# Altium PCB Thumb.PcbDoc (part 2 of 2)
Units mm, origin at the board's own origin, x right, y up, seen from the top; angles counter-clockwise.
Board outline 100.7 x 63.21 mm, 4 copper layers (Top Layer, Plane 1, Plane 2, Bottom Layer), stack 0.781 mm thick; 93 components, 47 nets, 311 pads, 257 vias.
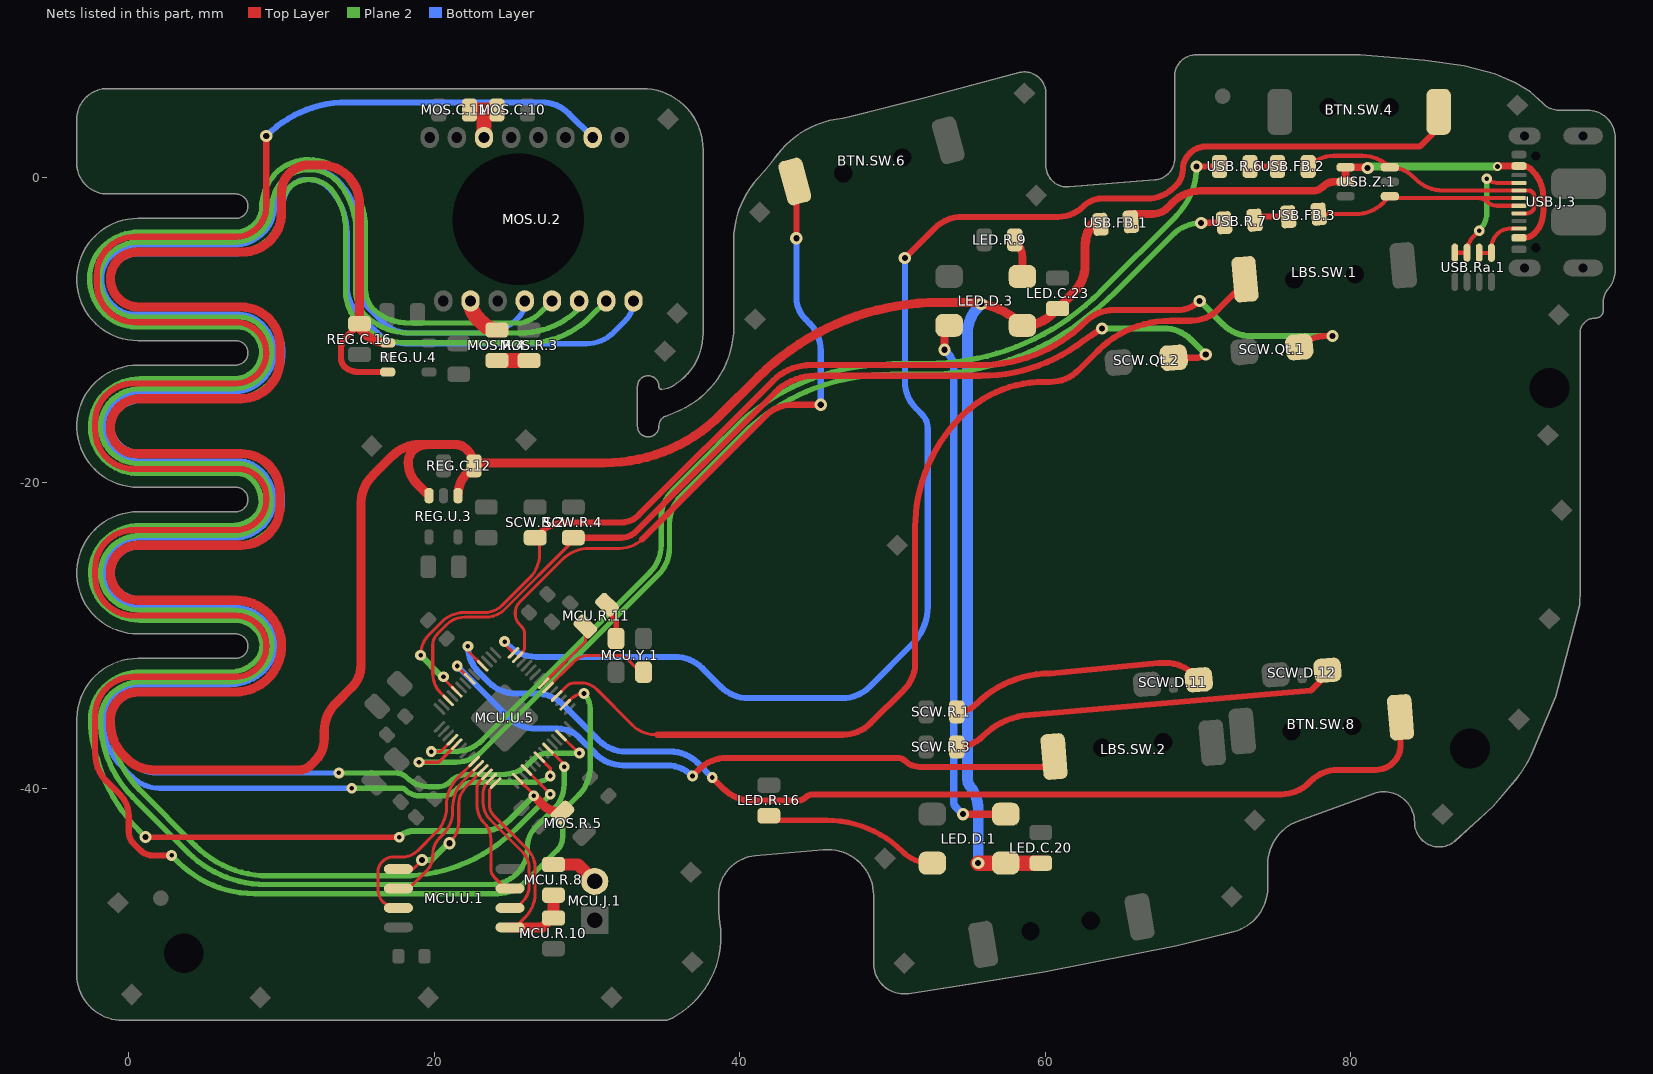
[diagram p4: the nets of this part, all layers, seen from the top]

## Via types
v1: diameter 0.8, hole 0.4, Top Layer to Bottom Layer, tented both sides, 188 vias
v2: diameter 1.016, hole 0.508, Top Layer to Bottom Layer, tented both sides, 28 vias
v3: diameter 0.7, hole 0.3, Top Layer to Bottom Layer, tented both sides, 28 vias
v4: diameter 0.45, hole 0.45, Top Layer to Bottom Layer, tented both sides, 8 vias
v5: diameter 0.6, hole 0.6, Top Layer to Bottom Layer, tented both sides, 4 vias
v6: diameter 0.6, hole 0.3, Top Layer to Bottom Layer, tented both sides, 1 vias

## Nets (pads, with @x,y where several pads share a name; then routed paths per layer and width w, separated by ;. In a path a pad name is that pad's centre, name@x,y a point inside that pad or via, vN(x,y) a via of type N, cw(c..) or ccw(c..) an arc to the next point about the centre after c; other vN are vias at no path point) (continued)
NetBTN.SW.4_A: BTN.SW.4.A MCU.U.5.28 | length 95.9
  Top Layer w0.2: v3(24.6,-30.4) 24.6,-30.556 MCU.U.5.28@25.183,-31.14
  Top Layer w0.4: v1(50.8,-5.3) 52.756,-3.344 cw(c54.552,-5.14) 54.552,-2.6 60.81,-2.6 ccw(c60.81,-0.21) 62.5,-1.9 cw(c63.707,-3.107) 63.707,-1.4 66.648,-1.4 ccw(c66.648,1.14) 68.444,-0.656 68.576,-0.524 ccw(c67.551,0.5) 69,0.5 cw(c70.449,0.5) 69.424,1.524 69.5,1.6 cw(c70.466,0.634) 70.466,2 84.5,2 85.75,3.25 BTN.SW.4.A@85.75,4.275
  Bottom Layer w0.4: v3(24.6,-30.4) 24.856,-30.656 ccw(c26.652,-28.86) 26.652,-31.4 35.748,-31.4 cw(c35.748,-33.94) 37.544,-32.144 38.756,-33.356 ccw(c40.552,-31.56) 40.552,-34.1 46.707,-34.1 ccw(c46.707,-31.56) 48.503,-33.356 51.267,-30.592 ; v1(50.8,-5.3) 50.8,-13.348 ccw(c53.34,-13.348) 51.544,-15.144 51.914,-15.514 cw(c50.983,-16.445) 52.3,-16.445 52.3,-16.447 52.3,-28.099 cw(c48.776,-28.099) 51.267,-30.592
NetBTN.SW.6_A: BTN.SW.6.A MCU.U.5.27 | length 43.5
  Top Layer w0.2: MCU.U.5.27@25.466,-31.423 25.767,-31.122 ccw(c25.444,-30.8) 25.9,-30.8 25.9,-29.883 ccw(c25.217,-29.883) 25.7,-29.4 25.583,-29.283 cw(c26.266,-28.6) 25.3,-28.6 25.3,-28.5 cw(c26.266,-28.5) 25.583,-27.817 28.356,-25.044 cw(c30.152,-26.84) 30.152,-24.3 32.151,-24.3 ccw(c32.151,-22.251) 33.6,-23.7
  Top Layer w0.4: 33.6,-23.7 41.656,-15.644 cw(c43.452,-17.44) 43.452,-14.9 v1(45.3,-14.9) ; v1(43.7,-4) BTN.SW.6.A@43.7,-0.597
  Bottom Layer w0.4: v1(43.7,-4) 43.7,-7.851 ccw(c45.749,-7.851) 44.3,-9.3 44.556,-9.556 cw(c42.76,-11.352) 45.3,-11.352 v1(45.3,-14.9)
NetBTN.SW.8_B: BTN.SW.8.B MCU.U.5.32 | length 70.2
  Top Layer w0.2: v3(22.2,-30.7) 22.2,-31.02 MCU.U.5.32@23.168,-31.988
  Top Layer w0.4: v3(38.2,-39.3) 38.956,-40.056 ccw(c40.752,-38.26) 40.752,-40.8 43.817,-40.8 ccw(c43.817,-40.117) 44.3,-40.6 cw(c44.783,-41.083) 44.783,-40.4 75.448,-40.4 ccw(c75.448,-37.86) 77.244,-39.656 77.356,-39.544 cw(c79.152,-41.34) 79.152,-38.8 81.625,-38.8 ccw(c81.625,-37.171) 82.777,-38.323 ccw(c81.625,-37.171) 83.254,-37.171 BTN.SW.8.B@83.254,-35.348
  Bottom Layer w0.4: v3(22.2,-30.7) ccw(c24.614,-30.7) 22.907,-32.407 23.556,-33.056 ccw(c25.352,-31.26) 25.352,-33.8 26.648,-33.8 cw(c26.648,-36.34) 28.444,-34.544 30.756,-36.856 ccw(c32.552,-35.06) 32.552,-37.6 35.448,-37.6 cw(c35.448,-40.14) 37.244,-38.344 v3(38.2,-39.3)
NetLBS.SW.1_A: LBS.SW.1.A MCU.U.5.18 | length 65.6
  Top Layer w0.2: MCU.U.5.18@28.012,-33.968 28.654,-33.326 cw(c29.2,-33.873) 29.2,-33.1 29.6,-33.1 cw(c29.6,-34.549) 30.624,-33.524 32.979,-35.879 ccw(c34.477,-34.381) 34.6,-36.496
  Top Layer w0.4: 34.6,-36.5 46.748,-36.5 ccw(c46.748,-33.96) 48.544,-35.756 50.756,-33.544 ccw(c48.96,-31.748) 51.474,-32.111 ccw(c51.078,-32.057) 51.478,-32.058 51.478,-22.981 51.478,-22.979 cw(c61.802,-22.955) 51.478,-22.876 ; 51.478,-22.875 cw(c61.754,-22.951) 51.576,-21.53 cw(c61.802,-22.955) 54.501,-15.655 54.502,-15.654 cw(c59.901,-20.993) 59.905,-13.4 60.348,-13.4 ccw(c60.348,-10.86) 62.144,-12.656 63.421,-11.379 cw(c68.197,-16.153) 68.197,-9.4 69.53,-9.4 ccw(c69.53,-6.86) 71.326,-8.656 LBS.SW.1.A@72.995,-6.987
NetLBS.SW.2_B: LBS.SW.2.B MCU.U.5.35 | length 43.6
  Top Layer w0.2: v3(21.5,-32) 21.5,-32.017 MCU.U.5.35@22.32,-32.837
  Top Layer w0.4: v3(36.9,-39.2) 37.336,-38.764 cw(c39.132,-40.56) 39.132,-38.02 50.365,-38.02 cw(c50.365,-38.635) 50.8,-38.2 ccw(c51.766,-37.234) 51.766,-38.6 59.898,-38.6 LBS.SW.2.B@60.571,-37.927
  Bottom Layer w0.4: v3(21.5,-32) 24.856,-35.356 ccw(c26.652,-33.56) 26.652,-36.1 28.1,-36.1 cw(c28.1,-38.031) 29.466,-36.666 30.556,-37.756 ccw(c32.352,-35.96) 32.352,-38.5 35.21,-38.5 cw(c35.21,-40.89) v3(36.9,-39.2)
NetLED.D.1_2: LED.D.1.2 LED.D.3.4 | length 35.3
  Top Layer w0.5: v1(53.4,-11.3) 53.4,-10 LED.D.3.4@53.7,-9.7 ; v1(54.6,-41.7) LED.D.1.2@57.4,-41.7
  Bottom Layer w0.5: v1(53.4,-11.3) 53.576,-11.476 cw(c52.551,-12.5) 54,-12.5 54,-40.893 ccw(c54.5,-40.893) 54.146,-41.246 v1(54.6,-41.7)
NetLED.D.1_4: LED.D.1.4 LED.R.16.1 | length 11.5
  Top Layer w0.35: LED.R.16.1@41.9,-41.802 ccw(c42.618,-41.084) 42.618,-42.1 45.69,-42.1 cw(c45.692,-49.12) 50.657,-44.157 50.658,-44.158 ccw(c52.452,-42.36) 52.452,-44.9 LED.D.1.4@52.6,-44.9
NetLED.D.3_2: LED.D.3.2 LED.R.9.2 | length 2.5
  Top Layer w0.5: LED.R.9.2@58.002,-4.1 cw(c56.801,-5.301) 58.5,-5.301 ; LED.D.3.2@58.5,-6.5 58.5,-5.301
NetMCU.J.1_2: MCU.J.1.2 MCU.R.8.1 | length 3.2
  Top Layer w0.8: MCU.R.8.1@27.8,-44.998 29.398,-44.998 MCU.J.1.2@30.5,-46.1
NetMCU.R.8_2: MCU.R.8.2 MCU.R.10.2 MCU.U.1.1 MCU.U.5.56 | length 15.5
  Top Layer w0.2: MCU.U.5.56@24.017,-39.66 23.758,-39.919 ccw(c24.138,-40.3) 23.6,-40.3 23.6,-41.083 ccw(c24.607,-41.083) 23.895,-41.795 26.105,-44.005 cw(c24.91,-45.2) 26.6,-45.2 26.6,-46.877 cw(c24.372,-46.877) 25.948,-48.452 ; MCU.U.1.1@25.295,-49.105 25.947,-48.452
  Top Layer w0.65: MCU.U.1.1@24.95,-49.105 25.295,-49.105 27.093,-49.105 MCU.R.10.2@27.8,-48.398
  Top Layer w0.8: MCU.R.10.2@27.8,-48.398 MCU.R.8.2@27.8,-47.202
NetMCU.R.11_1: MCU.R.11.1 MCU.U.5.21 | length 4.8
  Top Layer w0.2: MCU.U.5.21@27.163,-33.12 29.891,-30.392 MCU.R.11.1@29.891,-29.409
NetMCU.R.11_2: MCU.R.11.2 MCU.Y.1.3 | length 2.5
  Top Layer w0.35: MCU.R.11.2@31.309,-27.991 31.309,-28.409 31.9,-29 MCU.Y.1.3@31.9,-30.2
NetMCU.U.1_2: MCU.U.1.2 MCU.U.5.55 | length 10.5
  Top Layer w0.2: MCU.U.5.55@23.734,-39.377 23.447,-39.665 ccw(c24.042,-40.26) 23.2,-40.26 23.2,-40.964 ccw(c24.736,-40.964) 23.65,-42.05 25.776,-44.176 cw(c24.751,-45.2) 26.2,-45.2 26.2,-46.41 cw(c24.775,-46.41) 25.783,-47.417 ; MCU.U.1.2@24.95,-47.835 25.365,-47.835 25.782,-47.417
NetMCU.U.1_3: MCU.U.1.3 MCU.U.5.54 | length 8.6
  Top Layer w0.2: 23.25,-42.25 cw(c24.336,-41.164) 22.8,-41.164 22.8,-40 cw(c23.414,-40) 22.98,-39.566 MCU.U.5.54@23.451,-39.095 ; 23.25,-42.25 cw(c22.164,-43.336) 23.7,-43.336 23.7,-45.282 ccw(c24.468,-45.282) 23.925,-45.825 ; 23.925,-45.825 24.665,-46.565 MCU.U.1.3@24.95,-46.565
NetMCU.U.1_5: MCU.U.1.5 MCU.U.5.53 | length 9.6
  Top Layer w0.2: MCU.U.1.5@17.65,-45.295 18.605,-45.295 v1(19.2,-44.7) ; v1(21,-43.6) ccw(c19.551,-42.151) 21.6,-42.151 21.6,-41.073 cw(c23.273,-41.073) 22.09,-39.89 MCU.U.5.53@23.168,-38.812
  Plane 2 w0.4: v1(19.2,-44.7) 19.8,-44.7 20.9,-43.6 v1(21,-43.6)
NetMCU.U.1_6: MCU.U.1.6 MCU.U.5.52 | length 10.3
  Top Layer w0.2: MCU.U.1.6@17.65,-46.565 18.335,-46.565 19.5,-45.4 ccw(c18.534,-44.434) 19.9,-44.434 19.9,-44.35 cw(c21.469,-44.35) 20.36,-43.24 20.55,-43.05 ; 20.551,-43.049 ccw(c18.981,-41.481) 21.2,-41.481 21.2,-41.266 cw(c23.74,-41.266) 21.944,-39.47 MCU.U.5.52@22.885,-38.529
NetMCU.U.1_7: MCU.U.1.7 MCU.U.5.51 | length 13.6
  Top Layer w0.2: 16.667,-47.467 cw(c17.555,-46.58) 16.3,-46.58 16.3,-45.524 cw(c17.324,-45.524) 16.6,-44.8 cw(c17.324,-45.524) 17.324,-44.5 17.912,-44.5 ccw(c17.912,-43.081) 18.916,-44.084 20.15,-42.85 ccw(c18.581,-41.281) 20.8,-41.281 20.8,-41.101 cw(c23.34,-41.101) 21.544,-39.305 MCU.U.5.51@22.602,-38.246 ; 16.668,-47.468 ccw(c17.555,-46.58) 17.555,-47.835 MCU.U.1.7@17.65,-47.835
NetMCU.U.5_2: MCU.U.5.2 MOS.R.5.1 MOS.U.2.12 | length 165.4
  Top Layer w0.2: MCU.U.5.2@25.466,-39.377 26.5,-40.411 v3(26.5,-40.5)
  Top Layer w0.35: v1(1.1,-43.2) v3(17.7,-43.2)
  Top Layer w0.6: v3(26.5,-40.5) 27.026,-41.026 ccw(c28.391,-39.66) MOS.R.5.1@28.391,-41.591
  Plane 2 w0.35: v1(1.1,-43.2) 0.656,-42.756 cw(c8.107,-35.302) -2.066,-38.059 ccw(c-2.403,-38.152) -2.072,-38.039 cw(c5.342,-35.496) -2.496,-35.496 cw(c0.496,-35.496) -1.93,-33.746 cw(c0.228,-35.302) -1.927,-33.742 cw(c0.278,-35.329) -1.863,-33.657 cw(c0.507,-35.507) -1.622,-33.383 cw(c0.749,-35.749) -0.557,-32.665 cw(c0.749,-35.749) 0.749,-32.4 6.2,-32.4 6.61,-32.4 ccw(c6.61,-30.044) 7.93,-31.996 ccw(c6.61,-30.044) 8.13,-31.844 ccw(c7.903,-31.578) 8.149,-31.826 8.365,-31.611 ccw(c8.116,-31.365) 8.387,-31.586 ccw(c7.203,-30.635) 8.714,-30.791 ccw(c7.203,-30.635) 8.457,-29.778 ccw(c8.168,-29.976) 8.446,-29.763 ccw(c7.103,-30.8) 8.303,-29.6 8.156,-29.453 ccw(c6.893,-30.987) 6.886,-29 6.794,-29 1.4,-29 0.705,-29 cw(c0.7,-25.716) -1.622,-28.039 cw(c0.506,-25.91) -1.734,-27.92 cw(c0.506,-25.91) -2.043,-24.31 cw(c0.506,-25.91) -1.62,-23.78 cw(c0.749,-26.153) 0.749,-22.8 5.2,-22.8 6.77,-22.8 ccw(c6.77,-20.674) 7.835,-22.514 ccw(c6.77,-20.674) 8.27,-22.181 ccw(c7.34,-21.24) 8.642,-21.472 ccw(c7.34,-21.24) 8.663,-21.241 ccw(c6.591,-21.241) 8.46,-20.347 ccw(c6.591,-21.241) 8.055,-19.775 ccw(c7.148,-20.684) 7.152,-19.4 cw(c7.147,-18.75) 7.15,-19.4 cw(c7.147,-18.75) 7.142,-19.4 0.611,-19.4 cw(c0.607,-16.251) -0.031,-19.335 cw(c0.607,-16.251) -1.616,-18.481 cw(c0.529,-16.329) -2.326,-15.291 cw(c0.529,-16.329) -1.615,-14.176 cw(c0.749,-16.549) 0.749,-13.2 4,-13.2 6.867,-13.2 ccw(c6.867,-11.329) 7.399,-13.123 ccw(c6.867,-11.329) 8.185,-12.656 ccw(c6.981,-11.444) 8.606,-11.972 ccw(c6.981,-11.444) 8.376,-10.458 ccw(c6.981,-11.444) 8.159,-10.207 cw(c9.052,-9.262) 8.131,-10.18 ccw(c7.21,-11.107) 7.928,-10.015 ccw(c7.21,-11.107) 7.215,-9.8 cw(c7.209,-9.15) 7.204,-9.8 0.471,-9.8 cw(c0.466,-6.876) -1.588,-8.958 cw(c0.72,-6.621) -2.564,-6.621 cw(c0.32,-6.621) -1.723,-4.585 cw(c0.649,-6.949) 0.649,-3.6 6.93,-3.6 6.932,-3.6 ccw(c6.932,-1.73) 8.254,-3.053 ccw(c7.176,-1.976) 8.687,-2.173 ccw(c8.342,-2.118) 8.689,-2.162 ccw(c7.151,-1.976) 8.7,-1.977 8.7,-1.901 cw(c10.35,-1.904) 8.711,-1.713 cw(c9.357,-1.783) 8.712,-1.704 cw(c12.365,-2.164) 8.912,-0.888 cw(c11.159,-1.716) 8.913,-0.883 cw(c12.365,-2.164) 8.964,-0.754 cw(c12.064,-2.039) 9.306,-0.127 cw(c12.064,-2.039) 9.675,0.318 ; 9.675,0.318 cw(c10.847,-0.844) 9.788,0.422 cw(c11.782,-1.97) 11.782,1.144 cw(c11.781,-2.165) 13.003,0.91 cw(c11.781,-2.165) 14.134,0.161 cw(c13.211,-0.754) 14.199,0.09 cw(c10.039,-3.447) 15.401,-2.411 ccw(c15.744,-2.343) 15.404,-2.426 cw(c12.31,-3.202) 15.5,-3.202 15.5,-3.347 cw(c12.96,-3.352) 15.5,-3.352 15.5,-7.353 ccw(c17.452,-7.344) 15.903,-8.532 ccw(c16.179,-8.317) 15.934,-8.567 ccw(c18.31,-6.187) 16.855,-9.219 ; 16.856,-9.219 16.857,-9.22 ccw(c18.361,-5.958) 18.354,-9.55 25.616,-9.55 ccw(c25.614,-9.2) 25.685,-9.543 ccw(c25.149,-7.06) 26.945,-8.856 MOS.U.2.12@27.701,-8.1
  Plane 2 w0.4: v3(17.7,-43.2) cw(c18.666,-44.166) 18.666,-42.8 23.148,-42.8 ccw(c23.148,-40.26) 24.944,-42.056 v3(26.5,-40.5)
NetMCU.U.5_4: MCU.U.5.4 MOS.U.2.10 | length 166.5
  Top Layer w0.2: MCU.U.5.4@26.032,-38.812 27.6,-40.38 v3(27.6,-40.4)
  Plane 2 w0.35: 4.344,-43.744 0.721,-40.121 0.719,-40.119 cw(c5.342,-35.496) -1.196,-35.495 cw(c0.496,-35.496) -0.7,-34.3 cw(c0.749,-35.749) 0.749,-33.7 6.608,-33.7 ccw(c6.61,-30.044) 9.196,-32.628 ccw(c7.203,-30.635) 9.219,-28.664 9.218,-28.663 ccw(c6.893,-30.987) 6.892,-27.7 6.891,-27.7 0.7,-27.7 cw(c0.7,-25.716) -0.702,-27.12 cw(c0.506,-25.91) -0.702,-24.7 cw(c0.749,-26.153) 0.749,-24.1 6.767,-24.1 ccw(c6.77,-20.674) 9.194,-23.095 ccw(c7.34,-21.24) 9.963,-21.239 ccw(c6.591,-21.241) 8.974,-18.855 ccw(c7.148,-20.684) 7.148,-18.1 0.607,-18.1 cw(c0.607,-16.251) -0.699,-17.56 -0.7,-17.559 cw(c0.529,-16.329) -0.699,-15.099 cw(c0.749,-16.549) 0.749,-14.5 6.865,-14.5 ccw(c6.867,-11.329) 9.108,-13.572 ccw(c6.981,-11.444) 9.052,-9.262 ccw(c7.21,-11.107) 7.21,-8.5 0.468,-8.5 cw(c0.466,-6.876) -0.682,-8.025 cw(c0.72,-6.621) -1.264,-6.619 cw(c0.32,-6.621) -0.799,-5.499 cw(c0.649,-6.949) 0.649,-4.9 7.004,-4.9 ccw(c7.005,-1.82) 9.179,-4.002 ccw(c7.249,-2.062) 9.94,-2.558 ccw(c7.249,-2.062) 9.941,-2.555 ccw(c7.151,-1.976) 10,-1.976 10,-1.903 cw(c10.35,-1.904) 10.003,-1.861 cw(c12.365,-2.164) 10.165,-1.25 cw(c12.064,-2.039) 10.599,-0.597 cw(c10.847,-0.844) 10.624,-0.574 cw(c11.782,-1.97) 11.785,-0.156 cw(c11.781,-2.165) 13.211,-0.754 cw(c10.039,-3.447) 14.2,-3.432 14.2,-3.433 14.2,-7.517 ccw(c16.97,-7.524) 15.018,-9.489 ccw(c18.31,-6.187) 18.315,-10.85 26.113,-10.85 ccw(c26.111,-5.067) 30.201,-9.156 MOS.U.2.10@31.257,-8.1 ; 4.345,-43.745 ccw(c9.16,-38.932) 9.16,-45.74 17.899,-45.74 ccw(c17.899,-35.212) 25.344,-42.657 v3(27.6,-40.4)
NetMCU.U.5_7: MCU.U.5.7 MOS.U.2.13 | length 158.1
  Top Layer w0.2: MCU.U.5.7@26.88,-37.963 27.6,-38.683 v3(27.6,-39.2)
  Plane 2 w0.35: v3(14.6,-40) 16.393,-40 17.859,-40 cw(c17.859,-40.341) 18.1,-40.1 ccw(c19.066,-39.134) 19.066,-40.5 20.576,-40.5 ccw(c20.576,-39.476) 21.3,-40.2 cw(c22.749,-41.649) 22.749,-39.6 24.834,-39.6 26.634,-39.6 ccw(c26.634,-38.234) v3(27.6,-39.2)
  Bottom Layer w0.35: 13.731,-0.268 ccw(c11.735,-2.266) 11.734,0.558 ccw(c11.736,-1.605) 10.207,-0.075 ccw(c11.805,-1.673) 9.545,-1.673 9.545,-1.9 cw(c7.11,-1.9) 9.019,-3.411 cw(c7.11,-1.9) 8.828,-3.625 cw(c6.851,-1.651) 6.851,-4.445 0.649,-4.445 ccw(c0.649,-7.024) -1.179,-5.204 ccw(c0.262,-6.637) -1.77,-6.631 ccw(c0.683,-6.638) -1.044,-8.381 ccw(c1.157,-6.156) -1.042,-8.383 -1.041,-8.384 -1.039,-8.386 ccw(c-0.792,-8.138) -1.037,-8.388 ccw(c0.412,-6.91) 0.415,-8.98 0.47,-8.98 4.9,-8.98 7.209,-8.98 cw(c7.209,-11.091) 8.325,-9.299 cw(c7.209,-11.091) 8.703,-9.6 8.753,-9.649 cw(c6.904,-11.5) 9.52,-11.5 cw(c7.085,-11.5) 9.509,-11.729 cw(c7.085,-11.5) 8.805,-13.224 8.753,-13.275 cw(c6.897,-11.422) 7.463,-13.983 cw(c6.897,-11.422) 6.897,-14.045 0.811,-14.045 ccw(c0.811,-16.669) -0.662,-14.498 ccw(c0.811,-16.669) -1.041,-14.811 ccw(c0.463,-16.32) -1.462,-15.407 ccw(c0.463,-16.32) -1.668,-16.324 ccw(c0.547,-16.32) -1.555,-17.019 ccw(c0.547,-16.32) -1.015,-17.89 ccw(c0.656,-16.21) -0.452,-18.305 ccw(c0.656,-16.21) 0.659,-18.58 1.7,-18.58 6.7,-18.58 7.124,-18.58 cw(c7.124,-20.776) 8.678,-19.225 8.727,-19.274 cw(c6.879,-21.125) 9.366,-20.313 cw(c6.879,-21.125) 9.495,-21.125 9.495,-21.153 cw(c7.128,-21.153) 9.436,-21.676 cw(c7.128,-21.153) 8.8,-22.828 cw(c6.887,-20.912) 7.726,-23.487 cw(c6.887,-20.912) 6.887,-23.62 3.8,-23.62 0.647,-23.62 ccw(c0.642,-25.921) -0.51,-23.929 ccw(c0.642,-25.921) -1.261,-24.627 ccw(c0.642,-25.921) -1.658,-25.991 cw(c-3.102,-26.032) -1.657,-26.033 ccw(c0.289,-26.033) -1.628,-26.37 ccw(c0.289,-26.033) -1.086,-27.411 ccw(c0.774,-25.548) -0.89,-27.588 ccw(c0.774,-25.548) 0.776,-28.18 1.9,-28.18 7.008,-28.18 cw(c7.008,-30.717) 8.803,-28.925 8.813,-28.934 cw(c7.05,-30.7) 9.545,-30.7 cw(c7.351,-30.7) 8.901,-32.253 8.878,-32.275 cw(c6.6,-30) 7.275,-33.148 cw(c6.6,-30) 6.6,-33.22 2.8,-33.22 0.653,-33.22 ccw(c0.65,-35.55) -0.087,-33.339 ccw(c0.65,-35.55) -1.116,-34.03 ccw(c0.65,-35.55) -1.68,-35.51 -1.68,-35.677 ccw(c2.524,-35.625) -1.269,-37.438 ccw(c2.524,-35.625) -0.65,-38.382 0.224,-39.256 ccw(c2.02,-37.46) 2.02,-40 v3(14.6,-40) ; 13.732,-0.268 cw(c10.664,-3.333) 15,-3.334 15,-3.335 15,-6.823 ccw(c17.54,-6.823) 15.744,-8.619 16.581,-9.456 ccw(c18.377,-7.66) 18.377,-10.2 23.169,-10.2 23.171,-10.2 ccw(c23.171,-6.992) 25.44,-9.26 25.519,-9.181 ccw(c24.49,-8.153) 25.942,-8.248 ccw(c25.542,-8.223) 25.942,-8.235 25.939,-8.204 ccw(c25.541,-8.241) 25.931,-8.153 25.923,-8.153 MOS.U.2.13@25.923,-8.1
NetMCU.U.5_9: MCU.U.5.9 MOS.U.2.11 | length 170.3
  Top Layer w0.2: MCU.U.5.9@27.446,-37.398 28.5,-38.451 v3(28.5,-38.6)
  Plane 2 w0.35: -1.399,-34.121 ccw(c0.496,-35.496) -1.846,-35.496 ccw(c5.342,-35.496) 0.263,-40.582 0.469,-40.789 0.471,-40.791 0.473,-40.792 3.877,-44.196 ccw(c8.956,-39.118) 8.956,-46.3 23.71,-46.3 ccw(c23.71,-43.91) 25.4,-45.6 ccw(c23.71,-43.91) 26.1,-43.91 26.1,-43.8 cw(c27.79,-43.8) 26.595,-42.605 27.8,-41.4 ccw(c26.11,-39.71) 28.5,-39.71 v3(28.5,-38.6) ; -1.353,-34.059 cw(c0.507,-35.507) -1.161,-33.842 cw(c0.749,-35.749) 0.749,-33.05 6.2,-33.05 6.608,-33.05 ccw(c6.61,-30.044) 8.574,-32.319 ccw(c8.345,-32.055) 8.591,-32.304 8.856,-32.039 ccw(c7.203,-30.635) 9.163,-29.707 ccw(c7.203,-30.635) 8.758,-29.123 ccw(c8.507,-29.367) 8.755,-29.12 ccw(c6.893,-30.987) 6.888,-28.35 6.7,-28.35 0.704,-28.35 ; 0.703,-28.35 0.7,-28.35 cw(c0.7,-25.716) -1.162,-27.579 cw(c0.506,-25.91) -1.854,-25.899 cw(c0.506,-25.91) -1.161,-24.24 cw(c0.749,-26.153) 0.749,-23.45 5.2,-23.45 6.767,-23.45 ccw(c6.77,-20.674) 7.406,-23.376 ccw(c6.77,-20.674) 8.39,-22.929 ccw(c6.77,-20.674) 8.731,-22.639 ccw(c7.34,-21.24) 9.156,-22.011 ccw(c7.34,-21.24) 9.313,-21.241 ccw(c6.591,-21.241) 9.047,-20.068 ccw(c6.591,-21.241) 8.513,-19.314 ccw(c7.148,-20.684) 7.147,-18.75 ccw(c7.144,-19.1) 7.144,-18.75 0.611,-18.75 cw(c0.607,-16.251) -0.54,-18.471 cw(c0.607,-16.251) -1.157,-18.021 cw(c0.529,-16.329) -1.157,-14.638 cw(c0.749,-16.549) 0.749,-13.85 4,-13.85 6.865,-13.85 ccw(c6.867,-11.329) 8.275,-13.42 ccw(c6.867,-11.329) 8.647,-13.114 ccw(c6.981,-11.444) 9.122,-12.433 ccw(c6.981,-11.444) 8.766,-9.902 ccw(c6.981,-11.444) 8.604,-9.733 cw(c9.052,-9.262) 8.591,-9.721 ccw(c7.21,-11.107) 7.209,-9.15 ccw(c7.206,-9.5) 7.206,-9.15 0.47,-9.15 cw(c0.466,-6.876) -1.138,-8.489 cw(c0.72,-6.621) -1.491,-8.053 cw(c0.72,-6.621) -1.914,-6.621 cw(c0.32,-6.621) -1.261,-5.042 cw(c0.649,-6.949) 0.649,-4.25 6.965,-4.25 6.967,-4.25 ccw(c6.967,-1.789) 8.704,-3.533 ccw(c7.151,-1.976) 9.35,-1.976 9.35,-1.903 cw(c10.35,-1.904) 9.35,-1.902 cw(c10.35,-1.904) 9.357,-1.784 ; 9.357,-1.783 cw(c12.365,-2.164) 9.565,-1.002 cw(c12.064,-2.039) 10.137,-0.14 cw(c10.847,-0.844) 10.207,-0.075 cw(c11.782,-1.97) 10.631,0.209 cw(c11.782,-1.97) 11.784,0.494 cw(c11.781,-2.165) 13.097,0.145 cw(c11.781,-2.165) 13.672,-0.296 cw(c13.211,-0.754) 13.706,-0.333 cw(c10.039,-3.447) 14.766,-2.551 ccw(c15.109,-2.484) 14.77,-2.569 cw(c12.31,-3.202) 14.85,-3.202 14.85,-4.6 14.85,-7.337 ccw(c17.452,-7.344) 15.415,-8.963 15.415,-8.964 ccw(c15.689,-8.745) 15.433,-8.984 ccw(c16.97,-7.524) 15.477,-9.029 ccw(c18.31,-6.187) 18.304,-10.2 25.62,-10.2 25.621,-10.2 ccw(c25.619,-4.742) 29.371,-8.707 ccw(c29.129,-8.453) 29.479,-8.455 MOS.U.2.11@29.479,-8.1
NetMCU.U.5_12: MCU.U.5.12 MOS.U.2.9 | length 165.8
  Top Layer w0.2: MCU.U.5.12@28.295,-36.549 29.446,-37.7 v3(29.5,-37.7)
  Plane 2 w0.35: v3(13.758,-39) 17.476,-39 cw(c17.476,-40.024) 18.2,-39.3 ccw(c19.649,-37.851) 19.649,-39.9 20.276,-39.9 ccw(c20.276,-38.876) 21,-39.6 cw(c22.207,-40.807) 22.207,-39.1 24.448,-39.1 ccw(c24.448,-36.56) 26.244,-38.356 26.5,-38.1 cw(c27.466,-39.066) 27.466,-37.7 v3(29.5,-37.7)
  Bottom Layer w0.35: 0.101,-27.497 ccw(c0.774,-25.548) 0.774,-27.61 7.058,-27.61 cw(c7.058,-30.15) 7.528,-27.654 cw(c7.008,-30.717) 8.973,-28.311 cw(c7.008,-30.717) 9.208,-28.523 9.215,-28.53 cw(c7.05,-30.7) 10.108,-30.493 cw(c7.05,-30.7) 10.115,-30.7 cw(c7.351,-30.7) 9.303,-32.657 9.283,-32.677 cw(c6.6,-30) 8.726,-33.138 cw(c6.6,-30) 6.6,-33.79 5.2,-33.79 ccw(c5.199,-34.14) 5.199,-33.79 2.8,-33.79 2.799,-33.79 0.655,-33.79 ccw(c0.65,-35.55) 0.148,-33.863 ccw(c0.65,-35.55) -0.642,-34.354 ccw(c0.65,-35.55) -1.109,-35.497 -1.109,-35.698 ccw(c-0.759,-35.697) -1.109,-35.703 ccw(c2.524,-35.625) -0.641,-37.41 ccw(c2.524,-35.625) -0.36,-37.836 0.06,-38.256 ccw(c1.856,-36.46) 1.856,-39 13.1,-39 v3(13.758,-39) ; 0.101,-27.497 cw(c0.774,-25.548) -0.606,-27.08 cw(c-0.371,-26.821) -0.617,-27.07 -0.74,-26.947 cw(c0.289,-26.033) -1.087,-26.034 ccw(c-3.102,-26.032) -1.088,-25.973 cw(c0.642,-25.921) -1.089,-25.939 -1.089,-25.901 cw(c0.642,-25.921) -0.868,-25.074 cw(c0.642,-25.921) 0.414,-24.205 cw(c0.642,-25.921) 0.644,-24.19 ccw(c0.647,-23.62) 0.65,-24.19 3.8,-24.19 6.887,-24.19 ccw(c6.887,-20.912) 7.91,-24.026 8.072,-23.973 ccw(c7.279,-21.56) 9.075,-23.356 9.111,-23.32 ccw(c6.887,-20.912) 9.202,-23.233 ccw(c7.128,-21.153) 10.065,-21.153 10.065,-21.125 ccw(c6.879,-21.125) 10.034,-20.681 ccw(c6.879,-21.125) 9.319,-19.076 ccw(c7.36,-20.693) 9.179,-18.92 ccw(c6.879,-21.125) 9.129,-18.869 9.083,-18.823 ccw(c7.124,-20.776) 9.043,-18.784 ccw(c7.124,-20.776) 7.132,-18.01 ccw(c7.075,-20.549) 7.075,-18.009 0.609,-18.009 cw(c0.656,-16.21) -0.62,-17.479 cw(c0.547,-16.32) -1.096,-16.395 cw(c0.547,-16.32) -1.098,-16.327 cw(c0.463,-16.32) -1.027,-15.854 cw(c0.463,-16.32) -0.667,-15.243 cw(c-0.414,-15.485) -0.663,-15.239 -0.613,-15.189 cw(c0.811,-16.669) 0.254,-14.692 cw(c0.811,-16.669) 0.811,-14.615 6.897,-14.615 ccw(c6.897,-11.422) 7.107,-14.608 ccw(c6.897,-11.422) 8.879,-13.926 ccw(c6.897,-11.422) 9.157,-13.678 9.207,-13.627 ccw(c7.085,-11.5) 9.921,-12.494 9.932,-12.462 ccw(c9.602,-12.347) 9.937,-12.448 9.937,-12.446 ccw(c7.085,-11.5) 10.09,-11.5 ccw(c6.904,-11.5) 9.753,-10.074 ccw(c6.904,-11.5) 9.155,-9.245 9.108,-9.198 ccw(c7.209,-11.091) 7.21,-8.41 ; 7.209,-8.41 4.9,-8.41 cw(c4.899,-8.06) 4.899,-8.41 0.472,-8.41 ccw(c0.47,-8.98) 0.47,-8.41 0.412,-8.41 cw(c0.412,-6.91) -0.638,-7.981 cw(c0.683,-6.638) -0.854,-7.726 cw(c0.683,-6.638) -1.187,-6.862 cw(c0.683,-6.638) -1.2,-6.636 cw(c0.262,-6.637) -0.957,-5.829 cw(c0.262,-6.637) -0.774,-5.605 cw(c0.649,-7.024) -0.313,-5.26 cw(c0.649,-7.024) 0.649,-5.015 6.851,-5.015 ccw(c6.851,-1.651) 8.25,-4.71 ccw(c6.851,-1.651) 9.232,-4.027 ccw(c7.11,-1.9) 9.882,-3.06 ccw(c7.11,-1.9) 10.115,-1.9 10.115,-1.802 cw(c11.852,-1.802) 10.624,-0.574 cw(c11.632,-1.583) 11.632,-0.156 11.785,-0.156 cw(c11.785,-1.98) 13.073,-0.689 cw(c10.117,-3.649) 14.3,-3.649 14.3,-3.65 14.3,-7.148 ccw(c16.84,-7.148) 15.044,-8.944 16.256,-10.156 ccw(c18.052,-8.36) 18.052,-10.9 29.948,-10.9 ccw(c29.948,-8.36) 31.744,-10.156 32.494,-9.406 ccw(c31.188,-8.1) MOS.U.2.9@33.035,-8.1
NetMCU.U.5_16: MCU.U.5.16 MOS.U.2.7 | length 176.8
  Top Layer w0.2: MCU.U.5.16@28.577,-34.534 28.966,-34.146 ; 28.966,-34.145 cw(c29.8,-34.98) v3(29.8,-33.8)
  Top Layer w0.4: v3(2.8,-44.4) 1.552,-44.4 cw(c1.552,-43.309) 0.78,-44.08 0.3,-43.6 cw(c1.024,-42.876) 0,-42.876 0,-41.8 ccw(c-1.931,-41.8) -0.566,-40.434 -1.456,-39.544 cw(c0.34,-37.748) -2.2,-37.748 -2.2,-36.595 -2.2,-36.594 -2.2,-35.24 cw(c0.34,-35.24) 0.34,-32.7 7,-32.7 ccw(c7,-30.7) 9,-30.7 ccw(c7,-30.7) 7,-28.7 0.34,-28.7 cw(c0.34,-26.16) -2.2,-26.16 -2.2,-25.64 cw(c0.34,-25.64) 0.34,-23.1 7,-23.1 ccw(c7,-21.1) 9,-21.1 9,-20.956 ccw(c7.144,-20.956) 7.144,-19.1 0.34,-19.1 cw(c0.34,-16.56) -2.2,-16.56 -2.2,-16.04 cw(c0.34,-16.04) 0.34,-13.5 7,-13.5 ccw(c7,-11.5) 9,-11.5 ccw(c7,-11.5) 7,-9.5 0.44,-9.5 cw(c0.44,-6.96) -2.1,-6.96 -2.1,-6.44 cw(c0.44,-6.44) 0.44,-3.9 7,-3.9 ccw(c7,-1.9) 9,-1.9 v1(9,2.7)
  Plane 2 w0.35: v3(2.8,-44.4) 3.227,-44.827 ccw(c8.231,-39.823) 8.231,-46.9 24.148,-46.9 ccw(c24.148,-44.36) 25.944,-46.156 28.046,-44.054 ccw(c27.193,-43.2) 28.4,-43.2 28.4,-42.207 cw(c30.107,-42.207) 28.9,-41 29.456,-40.444 ccw(c27.66,-38.648) 30.2,-38.648 30.2,-34.766 ccw(c28.834,-34.766) v3(29.8,-33.8)
  Bottom Layer w0.4: v1(9,2.7) cw(c14.309,-2.605) 14.309,4.9 14.311,4.9 27.016,4.9 cw(c27.016,2.36) 28.812,4.156 MOS.U.2.7@30.368,2.6
NetMCU.U.5_20: MCU.U.5.20 MCU.Y.1.1 | length 7.5
  Top Layer w0.2: MCU.U.5.20@27.446,-33.402 29.088,-31.761 cw(c30.2,-32.873) 30.2,-31.3 32.017,-31.3 cw(c32.017,-32.224) 32.671,-31.571 33.5,-32.4 MCU.Y.1.1@33.7,-32.4
NetMCU.U.5_38: MCU.U.5.38 SCW.Qt.1.E SCW.R.2.2 | length 76.7
  Top Layer w0.2: v3(19.1,-31.3) cw(c21.031,-31.3) 19.666,-29.934 19.924,-29.676 ; 19.924,-29.676 20.5,-29.1 cw(c21.949,-30.549) 21.949,-28.5 23.3,-28.5 ccw(c23.3,-26.869) 24.453,-28.022 26.384,-26.092 ccw(c24.486,-24.6) 26.9,-24.6 26.9,-24.327 ccw(c25.876,-24.327) SCW.R.2.2@26.6,-23.602 ; v3(20.6,-32.7) 20.6,-32.814 MCU.U.5.38@21.471,-33.685
  Top Layer w0.4: SCW.R.2.2@26.6,-23.602 26.858,-23.344 cw(c28.655,-25.14) 28.655,-22.6 32.248,-22.6 ccw(c32.248,-21.026) 33.36,-22.14 ; 33.361,-22.139 42.173,-13.327 cw(c44.652,-15.806) 44.652,-12.3 55.759,-12.3 ccw(c55.761,-2.549) 62.657,-9.443 cw(c64.452,-11.24) 64.452,-8.7 68.651,-8.7 ccw(c68.651,-6.651) v1(70.1,-8.1) ; SCW.Qt.1.E@76.621,-11.118 cw(c78.354,-12.851) 78.354,-10.4 v1(78.8,-10.4)
  Plane 2 w0.4: v3(19.1,-31.3) 20.429,-32.629 ccw(c20.6,-32.459) v3(20.6,-32.7) ; v1(70.1,-8.1) 71.656,-9.656 ccw(c73.452,-7.86) 73.452,-10.4 v1(78.8,-10.4)
NetMCU.U.5_40: MCU.U.5.40 SCW.Qt.2.E SCW.R.4.2 | length 65.3
  Top Layer w0.2: MCU.U.5.40@20.905,-34.251 20.427,-33.773 cw(c21.7,-32.5) 19.9,-32.5 19.9,-30.6 cw(c20.866,-30.6) 20.183,-29.917 20.8,-29.3 cw(c22.007,-30.507) 22.007,-28.8 23.393,-28.8 ccw(c23.393,-27.093) 24.6,-28.3 28.96,-23.94 ccw(c28.623,-23.602) SCW.R.4.2@29.1,-23.602
  Top Layer w0.4: SCW.R.4.2@29.1,-23.602 32.245,-23.602 ccw(c32.245,-22.27) 33.187,-23.213 ; 33.188,-23.212 42.302,-14.098 cw(c44.952,-16.747) 44.952,-13 55.774,-13 55.775,-13 ccw(c55.778,-2.045) 62.483,-10.708 cw(c62.729,-11.023) 62.509,-10.689 63.312,-10.157 v1(63.7,-9.9) ; SCW.Qt.2.E@68.396,-11.818 69.974,-11.818 ccw(c69.974,-11.074) v1(70.5,-11.6)
  Plane 2 w0.4: v1(63.7,-9.9) 67.748,-9.9 cw(c67.748,-12.44) 69.544,-10.644 v1(70.5,-11.6)
NetMCU.U.5_46: MCU.U.5.46 USB.R.6.2 | length 70.7
  Top Layer w0.2: v3(19.8,-37.6) 20.42,-37.6 MCU.U.5.46@21.188,-36.832
  Top Layer w0.4: v1(69.9,0.7) USB.R.6.2@71.398,0.7
  Plane 2 w0.35: v3(19.8,-37.6) 21.341,-37.6 ccw(c21.341,-35.06) 23.137,-36.856 34.106,-25.887 ccw(c32.31,-24.091) 34.85,-24.091 34.85,-22.302 cw(c37.39,-22.302) 35.594,-20.506 38.276,-17.824 ccw(c38.027,-17.578) 38.283,-17.816 cw(c51.191,-29.717) 39.29,-16.81 ccw(c39.051,-16.554) 39.298,-16.802 40.141,-15.959 cw(c40.848,-16.666) 40.188,-15.915 cw(c49.908,-26.973) 49.295,-12.263 ccw(c49.279,-11.913) 49.315,-12.261 cw(c51.191,-29.717) 50.008,-12.201 cw(c50.03,-12.55) 50.03,-12.2 52.256,-12.2 ccw(c52.27,3.805) 63.589,-7.511 68.571,-2.529 ccw(c65.313,0.7) v1(69.9,0.7)
NetMCU.U.5_47: MCU.U.5.47 USB.R.7.2 | length 70.7
  Top Layer w0.2: v3(19,-38.3) 20.286,-38.3 MCU.U.5.47@21.471,-37.115
  Top Layer w0.3: v1(70.2,-3) cw(c70.23,-3.03) v1@70.23,-2.987
  Top Layer w0.4: v1@70.23,-2.987 USB.R.7.2@71.701,-2.987
  Plane 2 w0.35: v3(19,-38.3) 21.4,-38.3 ccw(c21.4,-35.886) 23.107,-37.593 34.656,-26.044 ccw(c32.86,-24.248) 35.4,-24.248 35.4,-22.671 cw(c37.94,-22.671) 36.144,-20.875 40.602,-16.417 cw(c40.848,-16.666) 40.616,-16.404 cw(c49.908,-26.973) 49.909,-12.9 49.91,-12.9 52.359,-12.9 ; 52.36,-12.9 52.362,-12.9 ccw(c52.361,2.088) 56.992,-12.167 ccw(c52.27,3.805) 62.988,-8.944 63.031,-8.908 cw(c63.256,-9.176) 63.037,-8.903 ccw(c51.098,5.978) 64.549,-7.551 68.32,-3.78 cw(c70.21,-5.68) 70.197,-3 v1(70.2,-3)
NetMOS.C.10_2: MOS.C.10.2 MOS.C.11.2 MOS.U.2.3 | length 3.6
  Top Layer w1: MOS.C.11.2@22.302,4.4 23.325,4.4 ; MOS.U.2.3@23.256,2.6 23.256,4.331 23.325,4.4 ; MOS.C.10.2@24.098,4.4 23.325,4.4
NetMOS.R.3_1: MOS.R.3.1 MOS.R.4.2 | length 2.1
  Top Layer w1: MOS.R.4.2@24.1,-12.002 MOS.R.3.1@26.2,-12.002
NetMOS.R.4_1: MOS.R.4.1 MOS.U.2.15 | length 2.8
  Top Layer w1: MOS.U.2.15@22.367,-8.1 ccw(c23.977,-8.1) 22.839,-9.239 23.242,-9.642 ccw(c24.1,-8.785) MOS.R.4.1@24.1,-9.998
NetSCW.D.11_A: SCW.D.11.A SCW.R.1.1 | length 16.9
  Top Layer w0.4: SCW.R.1.1@54.202,-35 54.248,-35 ccw(c54.248,-33.262) 55.476,-34.492 cw(c60.327,-39.34) 60.31,-32.482 ccw(c60.307,-32.082) 60.344,-32.481 60.345,-32.48 67.419,-31.8 67.892,-31.8 cw(c67.892,-34.34) 69.688,-32.544 SCW.D.11.A@70.046,-32.902
NetSCW.D.12_A: SCW.D.12.A SCW.R.3.1 | length 25.6
  Top Layer w0.4: SCW.R.3.1@54.202,-37.3 ccw(c54.202,-34.892) 55.904,-36.596 cw(c59.307,-39.997) 59.293,-35.185 ccw(c59.29,-34.785) 59.324,-35.184 77.4,-33.6 77.503,-33.497 78.292,-32.708 ccw(c77.861,-32.277) SCW.D.12.A@78.471,-32.277
NetUSB.FB.1_1: USB.FB.1.1 USB.J.3.2 USB.J.3.11 USB.Z.1.4 USB.Z.1.5 | length 33.6
  Top Layer w0.4: USB.J.3.2@91,-3.97 91.348,-3.97 ccw(c91.348,-3.048) 92,-3.7 ccw(c90.551,-2.251) 92.6,-2.251 92.6,-1.3 ccw(c90.184,-1.3) 91.892,0.408 91.8,0.5 ccw(c91.406,0.171) 91.406,0.685 91.3,0.685 USB.J.3.11@91,0.73
  Top Layer w0.45: v6@89.672,0.73 USB.J.3.11@91,0.73
  Top Layer w0.5: USB.FB.1.1@65.499,-2.413 67.004,-2.413 ccw(c67.004,-1.004) 68,-2 68.356,-1.644 cw(c70.152,-3.44) 70.152,-0.9 77.476,-0.9 ccw(c77.476,0.124) 78.2,-0.6 cw(c78.924,-1.324) 78.924,-0.3 USB.Z.1.5@79.65,-0.3 USB.Z.1.4@79.65,0.65 80.879,0.65 ccw(c80.879,0.821) v1@81,0.7 ; v6(89.6,0.7) cw(c89.672,0.628) v6@89.672,0.73
  Plane 2 w0.5: v1@81,0.7 v6(89.6,0.7)
  other v1: 81.1,0.6
NetUSB.FB.2_1: USB.FB.2.1 USB.J.3.5 USB.J.3.8 USB.Z.1.3 | length 17.7
  Top Layer w0.27: USB.FB.2.1@77.202,0.7 cw(c78.892,-0.99) 78.892,1.4 80.748,1.4 cw(c80.748,-1.14) USB.Z.1.3@82.544,0.656 ; USB.Z.1.3@82.544,0.656 USB.Z.1.3@82.55,0.65 cw(c82.55,-1.523) 84.086,0.014 84.226,-0.126 ccw(c86.022,1.67) 86.022,-0.87 USB.J.3.8@91,-0.87 91.586,-0.87 cw(c91.586,-1.314) 91.9,-1 cw(c91.659,-1.241) 92,-1.241 92,-1.959 cw(c91.659,-1.959) 91.9,-2.2 cw(c91.49,-1.79) 91.49,-2.37 USB.J.3.5@91,-2.37
NetUSB.FB.2_2: USB.FB.2.2 USB.R.6.1 | length 1.8
  Top Layer w0.4: USB.R.6.1@73.402,0.7 USB.FB.2.2@75.198,0.7
NetUSB.FB.3_1: USB.FB.3.1 USB.J.3.6 USB.J.3.7 USB.Z.1.1 | length 16.3
  Top Layer w0.27: USB.FB.3.1@77.899,-2.413 80.335,-2.413 ccw(c80.335,0.127) 82.131,-1.669 USB.Z.1.1@82.55,-1.25 ccw(c82.84,-0.96) 82.84,-1.37 88.345,-1.37 ; USB.J.3.6@91,-1.87 89.552,-1.87 cw(c89.552,-0.948) 88.9,-1.6 ccw(c88.345,-2.155) 88.345,-1.37 ; USB.J.3.7@91,-1.37 88.345,-1.37
NetUSB.FB.3_2: USB.FB.3.2 USB.R.7.1 | length 2.3
  Top Layer w0.27: USB.R.7.1@73.699,-2.813 73.788,-2.598 cw(c73.813,-2.623) USB.R.7.1@73.813,-2.587
  Top Layer w0.4: USB.R.7.1@73.813,-2.587 USB.FB.3.2@75.901,-2.587
NetUSB.J.3_3: USB.J.3.3 USB.Ra.1.5 USB.Ra.1.6 | length 3.6
  Top Layer w0.26: USB.Ra.1.6@88.4,-4.95 USB.Ra.1.5@89.2,-4.95 89.2,-4.666 cw(c90.566,-4.666) 89.6,-3.7 cw(c90.397,-4.497) 90.397,-3.37 USB.J.3.3@91,-3.37
NetUSB.J.3_9: USB.J.3.9 USB.Ra.1.7 USB.Ra.1.8 | length 8.2
  Top Layer w0.27: USB.Ra.1.8@86.8,-4.95 USB.Ra.1.7@87.6,-4.95 cw(c89.169,-4.95) 88.06,-3.84 v3(88.4,-3.5) ; v3(88.9,-0.1) ccw(c89.552,0.552) 89.552,-0.37 USB.J.3.9@91,-0.37
  Plane 2 w0.35: v3(88.4,-3.5) ccw(c87.193,-2.293) 88.9,-2.293 v3(88.9,-0.1)
V_USB: LED.C.20.2 LED.C.23.2 LED.D.1.1 LED.D.3.1 REG.C.12.2 REG.C.16.2 REG.U.3.1 REG.U.3.3 REG.U.4.1 REG.U.4.3 USB.FB.1.2 | length 263.6
  Top Layer w0.4: REG.C.16.2@14.95,-9.748 14.185,-10.513 ccw(c14.871,-11.2) 13.9,-11.2 13.9,-11.892 ccw(c14.583,-11.892) 14.1,-12.375 ccw(c15.005,-11.47) 15.005,-12.75 REG.U.4.3@16.95,-12.75
  Top Layer w0.6: -0.306,-37.89 cw(c1.847,-35.734) -1.2,-35.734 -1.2,-35.732 -1.2,-35.5 cw(c0.6,-35.5) 0.6,-33.7 6.979,-33.7 ccw(c6.979,-30.678) 10.001,-30.678 ccw(c7.023,-30.678) 7.023,-27.7 0.6,-27.7 cw(c0.6,-25.9) -1.2,-25.9 cw(c0.6,-25.9) 0.6,-24.1 7.36,-24.1 ccw(c7.36,-21.56) 9.9,-21.56 9.9,-20.64 ccw(c7.36,-20.64) 7.36,-18.1 0.5,-18.1 cw(c0.5,-16.4) -1.2,-16.4 cw(c0.7,-16.4) 0.7,-14.5 7.36,-14.5 ccw(c7.36,-11.96) 9.9,-11.96 9.9,-11.04 ccw(c7.36,-11.04) 7.36,-8.5 0.664,-8.5 cw(c0.664,-6.636) -1.2,-6.636 cw(c0.535,-6.636) 0.535,-4.9 7.46,-4.9 ccw(c7.46,-2.36) 10,-2.36 10,-1 cw(c11.8,-1) 11.8,0.8 12.56,0.8 cw(c12.56,-1.74) 15.1,-1.74 REG.C.16.2@15.1,-9.598 14.95,-9.748 15.418,-10.215 ccw(c16.95,-8.683) REG.U.4.1@16.95,-10.85 ; -0.305,-37.891 -0.14,-38.056 ccw(c1.656,-36.26) 1.656,-38.8 11.176,-38.8 ccw(c11.176,-37.776) 11.9,-38.5 12.201,-38.199 ccw(c10.754,-36.752) 12.8,-36.752 12.8,-36.252 cw(c15.34,-36.252) 13.544,-34.456 14.597,-33.403 ccw(c13.143,-31.948) 15.2,-31.948 15.2,-21.352 cw(c17.74,-21.352) 15.201,-21.265 cw(c17.74,-21.352) 15.944,-19.556 17.256,-18.244 cw(c19.052,-20.04) 19.052,-17.5 19.566,-17.5 ; REG.U.3.3@19.65,-20.85 18.866,-20.066 cw(c20.231,-18.7) 18.3,-18.7 18.3,-18.624 cw(c19.324,-18.624) 18.6,-17.9 cw(c19.566,-18.866) 19.566,-17.5 ; REG.U.3.1@21.55,-20.85 cw(c23.717,-20.85) 22.185,-19.318 REG.C.12.2@22.602,-18.9 ; 31.125,-18.7 23.051,-18.7 ccw(c23.051,-19.3) 22.627,-18.876 REG.C.12.2@22.602,-18.9 ; 31.126,-18.7 31.129,-18.7 ccw(c31.131,-7.91) 38.762,-15.538 41.182,-13.118 cw(c53.054,-24.987) 53.054,-8.2 53.056,-8.2 54.876,-8.2 54.878,-8.2 cw(c54.879,-13.321) 58.173,-9.4 LED.D.3.1@58.5,-9.7 ; LED.D.3.1@58.5,-9.7 58.65,-9.7 ccw(c58.65,-7.16) 60.446,-8.956 LED.C.23.2@60.8,-8.602 61.856,-7.546 ccw(c60.06,-5.75) 62.6,-5.75 62.6,-4.541 cw(c65.14,-4.541) USB.FB.1.2@63.344,-2.745 ; 19.566,-17.5 21.376,-17.5 cw(c21.376,-18.524) 22.1,-17.8 22.18,-17.88 cw(c21.16,-18.9) REG.C.12.2@22.602,-18.9
  Top Layer w1: v1(55.6,-44.9) 55.602,-44.902 LED.C.20.2@59.7,-44.902
  Bottom Layer w0.7: v1(55.6,-44.9) 55.6,-41.366 ccw(c53.21,-41.366) 55.059,-39.851 cw(c55.6,-39.407) 54.9,-39.409 54.9,-10.252 cw(c57.44,-10.252) 55.644,-8.456 v1(55.8,-8.3)
pads on no net: BTN.SW.3. BTN.SW.4. BTN.SW.6. BTN.SW.8. LBS.SW.1. LBS.SW.2. LED.R.9.1 MCH.FID.1.1 MCH.FID.2.1 MCU.U.5.24 MCU.U.5.25 MOS.U.2. MOS.U.2.1 MOS.U.2.2 MOS.U.2.6 MOS.U.2.14 MOS.U.2.16 REG.U.3.4 REG.U.4.4 SCW.D.11. SCW.D.12. USB.J.3. USB.J.3.4 USB.J.3.10 USB.Z.1.6
copper on no net:
  other v4: 30,-16.8 30.8,-16.8 31.6,-16.8 32.4,-16.8 30,-13.2 30.8,-13.2 31.6,-13.2 32.4,-13.2
  other v5: 29.1,-16.8 33.3,-16.8 29.1,-13.2 33.3,-13.2

## Polygon pours and split planes (outlines as drawn)
GND on Top Layer "GND_L01_P002" (solid, remove dead copper, pour order 2): 97.3,8.008 -3.4,8.008 -3.4,-55.2 97.3,-55.2
3V3 on Top Layer "3V3_L01_P000" (solid, remove dead copper, pour order 0): 23.976,-23 cw(c23.976,-24.024) 24.7,-23.3 cw(c23.493,-24.507) 25.2,-24.507 25.2,-26.517 cw(c24.517,-26.517) 25,-27 cw(c24.517,-26.517) 24.517,-27.2 22.749,-27.2 cw(c22.749,-25.151) 21.3,-26.6 cw(c21.783,-26.117) 21.1,-26.117 21.1,-23.583 cw(c21.783,-23.583) 21.3,-23.1 cw(c21.541,-23.341) 21.541,-23
GND on Bottom Layer "GND_L04_P005" (solid, remove dead copper, pour order 5): 97.3,8.008 -3.4,8.008 -3.4,-55.2 97.3,-55.2
GND on Plane 1 "GND_L02_P003" (solid, remove dead copper, pour order 3): 97.3,8.008 -3.4,8.008 -3.4,-55.2 97.3,-55.2
3V3 on Plane 1 "3V3_L02_P001" (solid, remove dead copper, pour order 1): 27.548,-21.2 cw(c27.548,-23.74) 29.344,-21.944 30.856,-23.456 cw(c29.06,-25.252) 31.6,-25.252 31.6,-49.148 cw(c29.06,-49.148) 30.856,-50.944 29.344,-52.456 cw(c27.548,-50.66) 27.548,-53.2 18.652,-53.2 cw(c18.652,-50.66) 16.856,-52.456 14.344,-49.944 cw(c16.14,-48.148) 13.6,-48.148 13.6,-25.252 cw(c16.14,-25.252) 14.344,-23.456 15.856,-21.944 cw(c17.652,-23.74) 17.652,-21.2
GND on Plane 2 "GND_L03_P004" (solid, remove dead copper, pour order 4): 97.3,8.008 -3.4,8.008 -3.4,-55.2 97.3,-55.2

## Keep-outs
Keep-Out Layer:
  region: 95,-10.3 cw(c96.1,-10.3) 96.1,-9.2 96.1,-30.1 cw(c96.1,-29) 95,-29
  region: -2.3,-55.3 cw(c-3.4,-55.3) -3.4,-56.4 -3.4,-40.7 cw(c-3.4,-41.8) -2.3,-41.8
  lines w0.254: -3.4,-53.4 -3.4,-52.2 1.6,-52.2 2.6,-53.2 4.6,-53.2 5.6,-52.2 35.6,-52.2 35.6,-16.1 38.6,-13.1 38.6,-52.4 35.8,-55.2 -1.6,-55.2 -3.4,-53.4 ; -3.4,-39.2 -3.4,-36.2 12.6,-36.2 12.6,-18.3 14.6,-16.3 14.6,-39.2 -3.4,-39.2 ; 28.4,-17.1 28.4,-12.9 34,-12.9 34,-17.1 28.4,-17.1

## Silkscreen, mask and mechanical layers (free items; w line width, h text height)
Top Overlay:
  lines w0.6: 90,-3.5 90,-2.9
  text "BOOTLOADER" at 34.146,-33.6 h3 r270
Bottom Overlay:
  text "Ploopy Thumb R1.002 / November 2024" at 32.875,-28.8 h3
  text "Licensed under the / CERN-OHL-S v2 / Copyright Ploopy  / 2024" at 17.8,-48 h2
Board Outline:
  lines w0.2: -3.4,-52.2 ccw(c-0.4,-52.2) -0.4,-55.2 35.243,-55.2 ccw(c32.767,-49.735) 38.696,-48.816 cw(c45.416,-47.775) 38.616,-47.775 38.616,-47.015 cw(c41.216,-47.015) 40.989,-44.425 45.494,-44.03 cw(c45.756,-47.019) 48.756,-47.019 48.756,-51.465 ccw(c50.756,-51.465) 51.052,-53.443 55.2,-52.8 60,-52 68.6,-50.3 72.323,-49.389 ccw(c71.564,-46.487) 74.564,-46.487 74.564,-44.975 cw(c77.564,-44.975) 76.538,-42.156 81.486,-40.355 cw(c82.17,-42.235) 84.17,-42.235 84.17,-42.24 ccw(c85.77,-42.24) 86.798,-43.466 89.3,-41.2 90.921,-39.279 ccw(c83.499,-33.708) 91.816,-37.825 93.4,-34 94.994,-27.998 95,-27 95,-10.224 cw(c96,-10.224) 96,-9.224 96.03,-9.224 ccw(c96.03,-8.724) 96.53,-8.724 96.518,-8.252 cw(c97.917,-8.212) 96.86,-7.294 ccw(c95.5,-6.115) 97.3,-6.115 97.3,2.586 ccw(c95.5,2.586) 95.5,4.386 93.609,4.386 cw(c93.609,5.786) 92.577,4.841 91.758,5.582 90.779,6.184 89.417,6.765 87.429,7.283 84.824,7.647 80.6,8.008 69.865,8.008 ccw(c69.865,6.608) 68.465,6.608 68.465,1.223 cw(c67.065,1.223) 67.179,-0.172 61.548,-0.635 cw(c61.433,0.761) 60.033,0.761 60.033,5.489 ccw(c58.633,5.489) 58.346,6.859 52.1,5.2 47.179,3.943 cw(c41.671,32.948) 46.312,3.792 ccw(c47.255,-2.134) 42.458,1.47 cw(c25.204,14.432) 41.163,-0.094 ccw(c45.6,-4.133) 39.6,-4.133 39.6,-9.8 cw(c33.6,-9.8) 35.652,-15.438 35.161,-15.642 ccw(c35.4,-16.3) 34.7,-16.3 cw(c34,-16.3) 33.3,-16.3 33.3,-13.7 cw(c34,-13.7) 34.7,-13.7 ccw(c34.9,-13.7) 34.9,-13.9 35.29,-13.825 ccw(c33.6,-10.2) 37.6,-10.2 37.6,1.8 ccw(c33.6,1.8) 33.6,5.8 -1.4,5.8 ccw(c-1.4,3.8) -3.4,3.8 -3.4,0.9 ccw(c-1.4,0.9) -1.4,-1.1 7,-1.1 cw(c7,-1.9) 7,-2.7 0.6,-2.7 ccw(c0.6,-6.7) 0.6,-10.7 7,-10.7 cw(c7,-11.5) 7,-12.3 0.6,-12.3 ccw(c0.6,-16.3) 0.6,-20.3 7,-20.3 cw(c7,-21.1) 7,-21.9 0.6,-21.9 ccw(c0.6,-25.9) 0.6,-29.9 7,-29.9 cw(c7,-30.7) 7,-31.5 0.6,-31.5 ccw(c0.6,-35.5) -3.4,-35.458 -3.4,-52.2 ; -0.2,-35.475 cw(c0.6,-35.5) 0.6,-34.7 7,-34.7 ccw(c7,-30.7) 7,-26.7 0.6,-26.7 cw(c0.6,-25.9) 0.6,-25.1 7,-25.1 ccw(c7,-21.1) 7,-17.1 0.6,-17.1 cw(c0.6,-16.3) 0.6,-15.5 7,-15.5 ccw(c7,-11.5) 7,-7.5 0.6,-7.5 cw(c0.6,-6.7) 0.6,-5.9 7,-5.9 ccw(c7,-1.9) 11,-1.9 cw(c11.8,-1.9) 12.6,-1.9 12.6,-10.2 ccw(c16.6,-10.2) 16.6,-14.2 27.2,-14.2 ccw(c27.2,-13.7) 27.7,-13.7 cw(c28.4,-13.7) 29.1,-13.7 29.1,-16.3 cw(c28.4,-16.3) 27.7,-16.3 ccw(c27.2,-16.3) 27.2,-15.8 16.6,-15.8 ccw(c16.6,-19.8) 12.6,-19.8 12.6,-31.25 cw(c7.6,-31.25) 7.6,-36.25 0.6,-36.25 cw(c0.6,-35.45) -0.2,-35.475 ; 38.616,-28.745 ccw(c41.216,-28.745) 41.443,-31.335 46.017,-30.935 ccw(c45.756,-27.946) 48.756,-27.947 48.763,-19.064 ccw(c45.765,-18.952) 45.504,-15.964 44.771,-16.028 ccw(c44.998,-18.618) 43.006,-16.947 39.224,-21.454 ccw(c41.216,-23.125) 38.616,-23.125 38.616,-28.745 ; 56.764,-18.471 cw(c59.752,-18.21) 59.491,-15.221 82.403,-13.217 cw(c82.665,-16.205) 85.653,-15.944 86.525,-25.906 cw(c83.536,-26.167) 83.798,-29.156 60.885,-31.16 cw(c60.624,-28.172) 57.635,-28.433 56.764,-18.471

## Text inside footprints (layer, text, board x,y; h text height)
MCH.LOGO.2: Top Overlay "X" at 1.9,0.4 h2; Top Overlay "Y" at 0.399,2 h2
MOS.U.2: Top Overlay "Optic Side" at 35.3,1.125 h2 r270; Bottom Overlay "Sensor Side" at 34.85,-7.2 h2 r270; Bottom Overlay "1" at 16.2,-0.9 h4